# EAGLE board MIDILodica Mother Board (EAGLE 9.7.0)
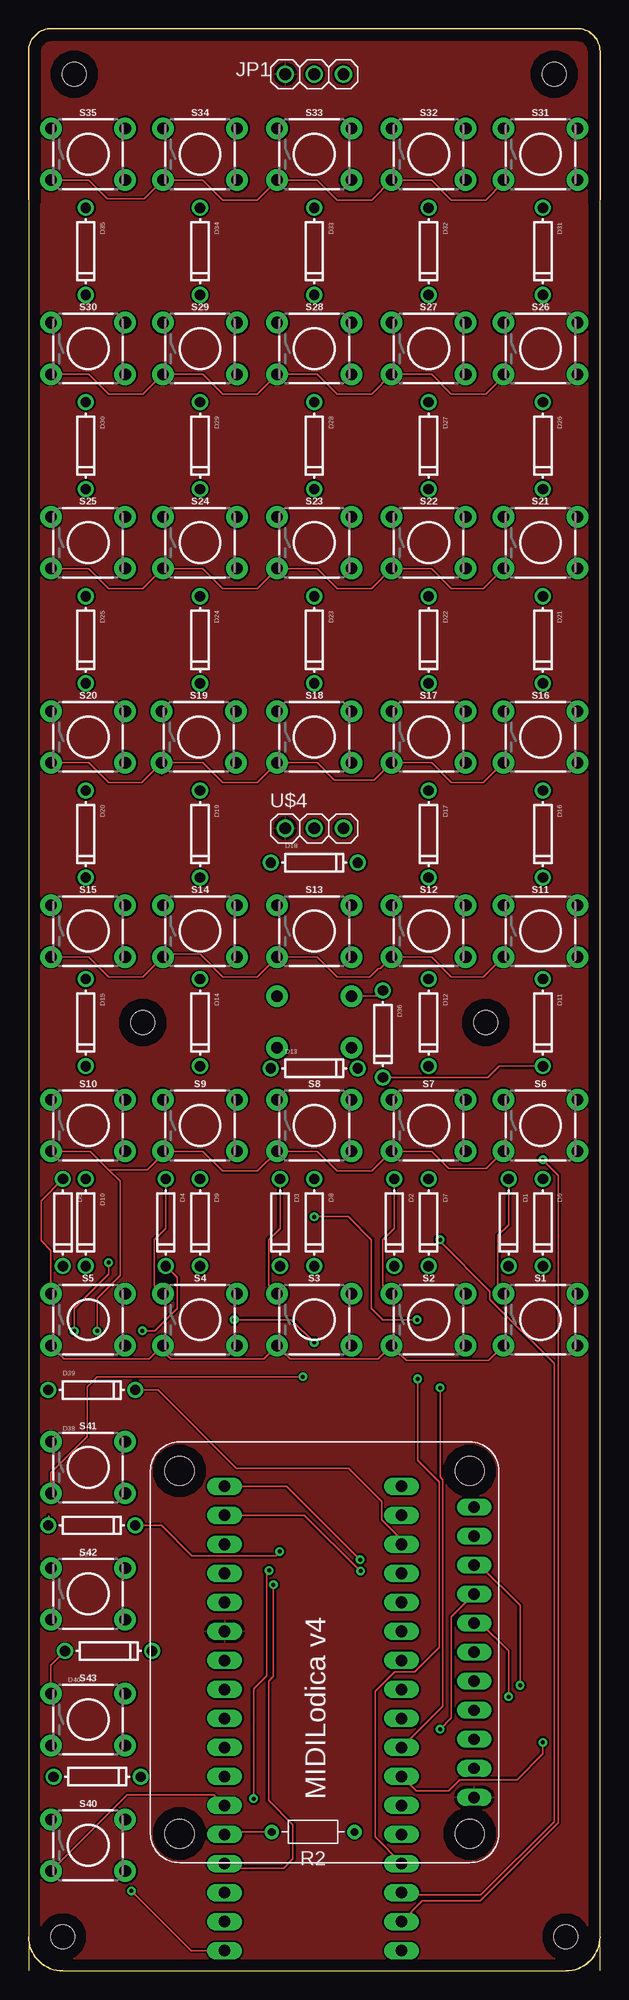
[diagram p0: board, top side]
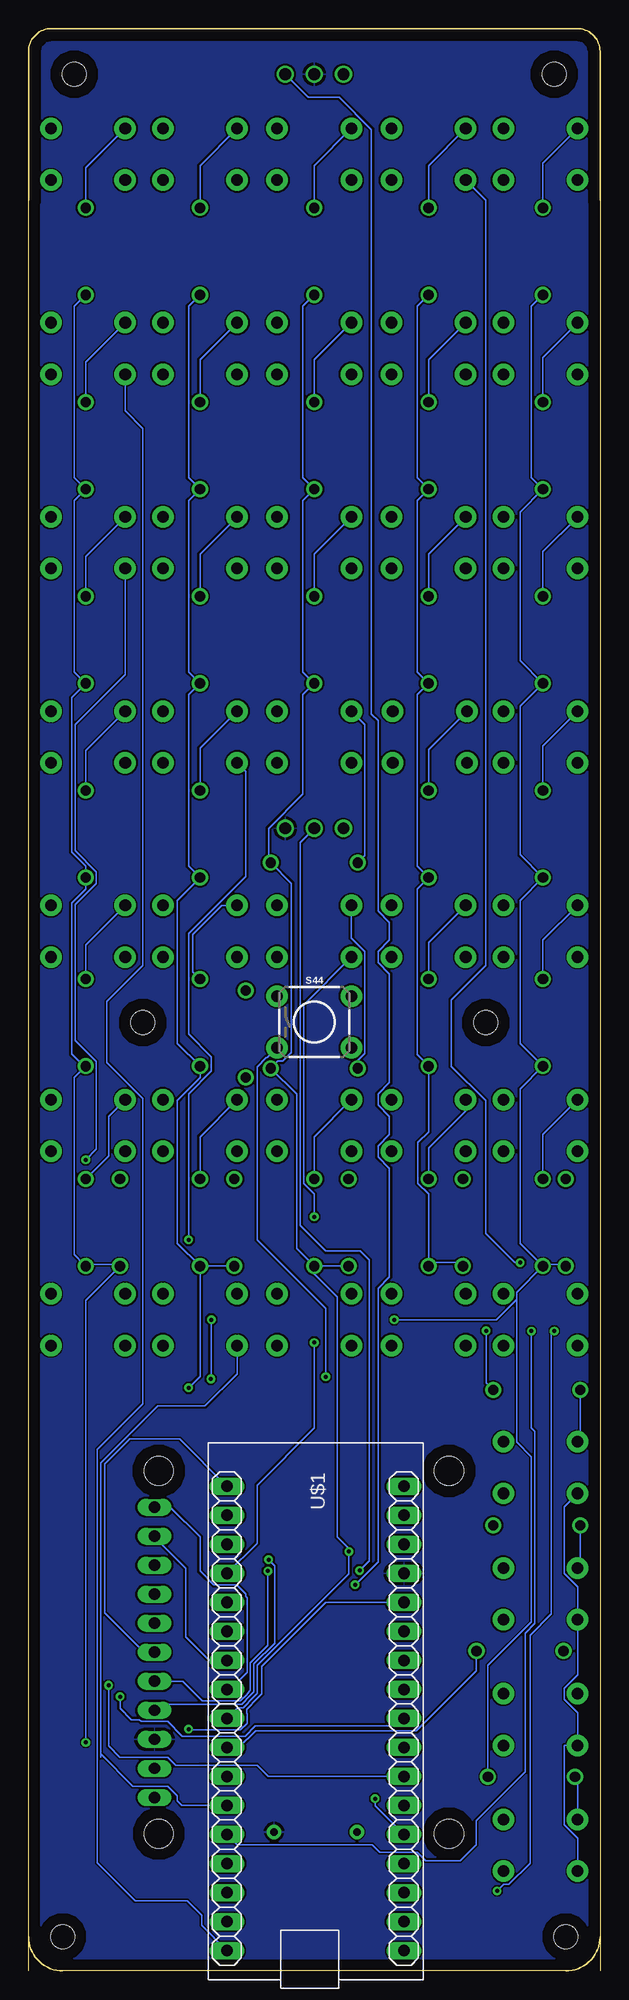
[diagram p1: board, bottom side, seen from below]

Size 50 x 170 mm. Coordinates in mm from the lower left corner, seen from the top.
Outline: 50,0 50,3
Outline: 50,3 50,155 50,168 arc90 48,170 2,170 arc90 0,168 0,155 0,3
Outline: 0,3 0,0
Outline: 0,3 arc90 3,0 47,0 arc90 50,3
Copper layers (1*16): Top / Bottom
Stack-up Default Layer Stack: Top User Defined 0.035mm / Dielectric-1 User Defined 1.5mm / Bottom User Defined 0.035mm
Design rules "default": minimum track width 6mil, minimum drill 0.35mm, track to track 6mil, track to pad 6mil, pad to pad 6mil, via to via 6mil, smd to smd 6mil, copper to edge 40mil, drill to drill 6mil, minimum pad ring 10mil, minimum via ring 8mil, stop-mask expansion 4mil, vias tented up to drill 0mil, thermal gap 10mil
Holes 2.1 mm at 4,166 46,166 3,3 47,3 10,83 40,83

## Footprints (pad centres in the part's own frame; a part is rotated, then mirrored left to right if it is on the bottom)
DO-1N4148 = drill 0.9: A -3.81,0; C 3.81,0
1X03 = drill 1.016: 1 -2.54,0; 2 0,0; 3 2.54,0
RESAD724W46L381D178B = drill 0.66 pad 1.26: 1 -3.62,0; 2 3.62,0
TL1105SPF160Q = drill 1.016 pad 1.88: 1 -3.251,2.261; 2 3.251,2.261; 3 -3.251,-2.261; 4 3.251,-2.261
ARDUINO-MICRO = drill 1.016 long: 1 3.81,1.651; 2 6.35,1.651; 3 8.89,1.651; 4 11.43,1.651; 5 13.97,1.651; 6 16.51,1.651; 7 19.05,1.651; 8 21.59,1.651; 9 24.13,1.651; 10 26.67,1.651; 11 29.21,1.651; 12 31.75,1.651; 13 34.29,1.651; 14 36.83,1.651; 15 39.37,1.651; 16 41.91,1.651; 17 44.45,1.651; 18 3.81,17.131; 19 6.35,17.131; 20 8.89,17.131; 21 11.43,17.131; 22 13.97,17.131; 23 16.51,17.131; 24 19.05,17.131; 25 21.59,17.131; 26 24.13,17.131; 27 26.67,17.131; 28 29.21,17.131; 29 31.75,17.131; 30 34.29,17.131; 31 36.83,17.131; 32 39.37,17.131; 33 41.91,17.131; 34 44.45,17.131
ADAFRUIT-ST7789-320X172 = drill 1 long: P$0 3.175,-0.381; P$1 5.715,-0.381; P$2 8.255,-0.381; P$3 10.795,-0.381; P$4 13.335,-0.381; P$5 15.875,-0.381; P$6 18.415,-0.381; P$7 20.955,-0.381; P$8 23.495,-0.381; P$9 26.035,-0.381; P$10 28.575,-0.381 | hole 2.54: 0,0; 31.75,0; 0,25.4; 31.75,25.4
SOFTPOT-1 = drill 1.016: 1 -2.54,0; 2 0,0; 3 2.54,0

## Placement (x,y rotation side)
D1  [DO-1N4148]  42,65.5 270 top
D2  [DO-1N4148]  32,65.5 270 top
D3  [DO-1N4148]  22,65.5 270 top
D4  [DO-1N4148]  12,65.5 270 top
D5  [DO-1N4148]  3,65.5 270 top
D6  [DO-1N4148]  45,65.5 270 top
D7  [DO-1N4148]  35,65.5 270 top
D8  [DO-1N4148]  25,65.5 270 top
D9  [DO-1N4148]  15,65.5 270 top
D10  [DO-1N4148]  5,65.5 270 top
D11  [DO-1N4148]  45,83 270 top
D12  [DO-1N4148]  35,83 270 top
D13  [DO-1N4148]  25,79 0 top
D14  [DO-1N4148]  15,83 270 top
D15  [DO-1N4148]  5,83 270 top
D16  [DO-1N4148]  45,99.5 270 top
D17  [DO-1N4148]  35,99.5 270 top
D18  [DO-1N4148]  25,97 0 top
D19  [DO-1N4148]  15,99.5 270 top
D20  [DO-1N4148]  5,99.5 270 top
D21  [DO-1N4148]  45,116.5 270 top
D22  [DO-1N4148]  35,116.5 270 top
D23  [DO-1N4148]  25,116.5 270 top
D24  [DO-1N4148]  15,116.5 270 top
D25  [DO-1N4148]  5,116.5 270 top
D26  [DO-1N4148]  45,133.5 270 top
D27  [DO-1N4148]  35,133.5 270 top
D28  [DO-1N4148]  25,133.5 270 top
D29  [DO-1N4148]  15,133.5 270 top
D30  [DO-1N4148]  5,133.5 270 top
D31  [DO-1N4148]  45,150.5 270 top
D32  [DO-1N4148]  35,150.5 270 top
D33  [DO-1N4148]  25,150.5 270 top
D34  [DO-1N4148]  15,150.5 270 top
D35  [DO-1N4148]  5,150.5 270 top
D36  [DO-1N4148]  31,82 270 top
D37  [DO-1N4148]  7,28 0 top
D38  [DO-1N4148]  5.53,39 0 top
D39  [DO-1N4148]  5.53,50.84 0 top
D40  [DO-1N4148]  6,17 0 top
JP1  [1X03]  25,166 0 top
R2  [RESAD724W46L381D178B]  24.9,12.17 180 top
S1  TL1105SPF160Q  [TL1105SPF160Q]  44.79,57 0 top
S2  TL1105SPF160Q  [TL1105SPF160Q]  35,57 0 top
S3  TL1105SPF160Q  [TL1105SPF160Q]  25,57 0 top
S4  TL1105SPF160Q  [TL1105SPF160Q]  15,57 0 top
S5  TL1105SPF160Q  [TL1105SPF160Q]  5.21,57 0 top
S6  TL1105SPF160Q  [TL1105SPF160Q]  44.79,74 0 top
S7  TL1105SPF160Q  [TL1105SPF160Q]  35,74 0 top
S8  TL1105SPF160Q  [TL1105SPF160Q]  25,74 0 top
S9  TL1105SPF160Q  [TL1105SPF160Q]  15,74 0 top
S10  TL1105SPF160Q  [TL1105SPF160Q]  5.21,74 0 top
S11  TL1105SPF160Q  [TL1105SPF160Q]  44.79,91 0 top
S12  TL1105SPF160Q  [TL1105SPF160Q]  35,91 0 top
S13  TL1105SPF160Q  [TL1105SPF160Q]  25,91 0 top
S14  TL1105SPF160Q  [TL1105SPF160Q]  15,91 0 top
S15  TL1105SPF160Q  [TL1105SPF160Q]  5.21,91 0 top
S16  TL1105SPF160Q  [TL1105SPF160Q]  44.79,108 0 top
S17  TL1105SPF160Q  [TL1105SPF160Q]  35,108 0 top
S18  TL1105SPF160Q  [TL1105SPF160Q]  25,108 0 top
S19  TL1105SPF160Q  [TL1105SPF160Q]  14.88,108 0 top
S20  TL1105SPF160Q  [TL1105SPF160Q]  5.21,108 0 top
S21  TL1105SPF160Q  [TL1105SPF160Q]  44.79,125 0 top
S22  TL1105SPF160Q  [TL1105SPF160Q]  35,125 0 top
S23  TL1105SPF160Q  [TL1105SPF160Q]  25,125 0 top
S24  TL1105SPF160Q  [TL1105SPF160Q]  15,125 0 top
S25  TL1105SPF160Q  [TL1105SPF160Q]  5.21,125 0 top
S26  TL1105SPF160Q  [TL1105SPF160Q]  44.79,142 0 top
S27  TL1105SPF160Q  [TL1105SPF160Q]  35,142 0 top
S28  TL1105SPF160Q  [TL1105SPF160Q]  25,142 0 top
S29  TL1105SPF160Q  [TL1105SPF160Q]  15,142 0 top
S30  TL1105SPF160Q  [TL1105SPF160Q]  5.21,142 0 top
S31  TL1105SPF160Q  [TL1105SPF160Q]  44.79,159 0 top
S32  TL1105SPF160Q  [TL1105SPF160Q]  35,159 0 top
S33  TL1105SPF160Q  [TL1105SPF160Q]  25,159 0 top
S34  TL1105SPF160Q  [TL1105SPF160Q]  15,159 0 top
S35  TL1105SPF160Q  [TL1105SPF160Q]  5.21,159 0 top
S40  TL1105SPF160Q  [TL1105SPF160Q]  5.21,11 0 top
S41  TL1105SPF160Q  [TL1105SPF160Q]  5.21,44.06 0 top
S42  TL1105SPF160Q  [TL1105SPF160Q]  5.21,33 0 top
S43  TL1105SPF160Q  [TL1105SPF160Q]  5.21,22 0 top
S44  TL1105SPF160Q  [TL1105SPF160Q]  25,83.06 0 bottom
U$1  ARDUINO_MICRO  [ARDUINO-MICRO]  34.29,46.23 270 bottom
U$2  ADAFRUIT-ST7789-320X172  [ADAFRUIT-ST7789-320X172]  38.61,12.02 90 top
U$4  SOFTPOT  [SOFTPOT-1]  25,100 0 top

## Library data of the parts
D1-D40 JP1 = adafruit
R2 = Resistor; CATEGORY: Resistor; SUB-CATEGORY: Fixed
S1-S35 S40-S44 U$1 U$2 U$4 = Standard

## Nets
5V+: JP1.1 U$1.23 U$2.P$0 U$4.1
GND: JP1.2 R2.1 U$1.21 U$2.P$2 U$4.3
N$2: R2.2 U$1.30 U$4.2
N$3: JP1.3 U$1.31
N$4: D25.A S25.1
N$5: D24.A S24.1
N$6: D23.A S23.1
N$7: U$1.26 U$2.P$6
N$8: D4.C D9.C D14.C D19.C D24.C D29.C D34.C D39.C U$1.3
N$9: D22.A S22.1
N$10: D39.A S41.1
N$11: D38.A S42.1
N$12: D37.A S43.1
N$13: D1.A S1.1
N$14: D2.A S2.1
N$15: D3.A S3.1
N$16: D4.A S4.1
N$17: D5.A S5.1
N$18: D10.A S10.1
N$19: D9.A S9.1
N$20: D8.A S8.1
N$21: D7.A S7.1
N$22: D6.A S6.1
N$23: D36.A S44.1
N$24: D21.A S21.1
N$25: S40.3 S41.3 S42.3 S43.3 S44.3 U$1.29
N$26: D30.A S30.1
N$27: D29.A S29.1
N$28: D28.A S28.1
N$29: U$1.22 U$2.P$7
N$30: D27.A S27.1
N$31: D26.A S26.1
N$32: U$1.28 U$2.P$8
N$33: D35.A S35.1
N$34: D34.A S34.1
N$35: D11.A S11.1
N$36: D12.A S12.1
N$37: D13.A S13.1
N$38: D14.A S14.1
N$39: D15.A S15.1
N$40: D20.A S20.1
N$41: D19.A S19.1
N$42: D18.A S18.1
N$43: D17.A S17.1
N$44: D16.A S16.1
N$45: D33.A S33.1
N$46: D32.A S32.1
N$47: D31.A S31.1
N$48: U$1.18 U$2.P$3
N$49: U$1.19 U$2.P$4
N$50: U$1.7 U$2.P$9
N$51: U$1.8 U$2.P$10
N$52: U$1.1 U$2.P$5
N$53: D1.C D6.C D11.C D16.C D21.C D26.C D31.C D36.C U$1.11
N$54: D2.C D7.C D12.C D17.C D22.C D27.C D32.C D37.C U$1.10
N$55: D3.C D8.C D13.C D18.C D23.C D28.C D33.C D38.C U$1.9
N$56: D5.C D10.C D15.C D20.C D25.C D30.C D35.C D40.C U$1.4
N$57: D40.A S40.1
N$59: S1.3 S2.3 S3.3 S4.3 S5.3 U$1.12
N$60: S6.3 S7.3 S8.3 S9.3 S10.3 U$1.13
N$61: S11.3 S12.3 S13.3 S14.3 S15.3 U$1.14
N$62: S16.3 S17.3 S18.3 S19.3 S20.3 U$1.15
N$63: S21.3 S22.3 S23.3 S24.3 S25.3 U$1.16
N$64: S26.3 S27.3 S28.3 S29.3 S30.3 U$1.17
N$65: S31.3 S32.3 S33.3 S34.3 S35.3 U$1.34

## Tracks (layer width: path | path; a pad name or v marks a point on that pad's centre or on a via)
5V+
  pour Top: 0,0 50,0 50,175 0,175
GND
  pour Bottom: 1,169 49,169 49,1.33 48.5,1 3,1 1,3
N$2  (via drill 0.35)
  Top 0.152: v19.68,15.08 19.68,24.68 20.82,25.82 20.82,34.82 v21.04,35.04 | R2.2 17.39,12.17 U$1.30
  Bottom 0.152: U$4.2 26.24,98.76 26.24,65.24 24,63 20.99,63 20.2,62.21 20.2,35.89 v21.04,35.04 | v19.68,15.08 19.68,14.46 U$1.30
N$3  (via drill 0.35)
  Top 0.152: v21.43,33.8 21.43,25.77 21,25.34 21,14.93 23.14,12.79 23.14,9.82 22.32,9 17.56,9 U$1.31
  Bottom 0.152: v21.43,33.8 19.42,35.81 19.42,59.74 18.42,60.74 18.42,70.25 19.42,71.25 19.42,72.22 18.42,73.22 18.42,74.78 19.42,75.78 19.42,76.75 18.42,77.75 18.42,87.25 19.42,88.25 19.42,89.22 18.42,90.22 18.42,91.78 19.42,92.78 19.42,109.42 20,110 20,161.16 22.84,164 25.54,164 JP1.3
N$4
  Bottom 0.152: S25.1 5,124.22 D25.A
N$5
  Bottom 0.152: S24.1 15,124.01 D24.A
N$6
  Bottom 0.152: S23.1 25,124.01 D23.A
N$7  (via drill 0.35)
  Top 0.152: v42,24 42,26 42,26.42 42,28 39.57,30.43 U$2.P$6
  Bottom 0.152: U$1.26 17.82,21.43 30.16,21.43 31.04,20.55 36.55,20.55 37.83,21.83 40.15,21.83 40.32,22 41,22 42,23 v42,24
N$8  (via drill 0.35)
  Top 0.152: D4.C 13,60.69 13,58 11.04,56.03 v9.96,56.03 | U$1.3 32.64,37.72 30.89,39.47 30.89,41.11 28,44 18.18,44 11.34,50.84 D39.C
  Bottom 0.152: D34.C 16,145.69 16,130.69 D29.C 16,128.69 16,113.69 D24.C 16,111.69 16,96.69 D19.C 16,94.69 16,80.19 D14.C 15,73.44 15.93,72.51 15.93,68.92 15,67.99 15,62 | 15,62 D9.C | D4.C 12.31,62 15,62 | v9.96,56.03 9.96,51.47 D39.C
N$9
  Bottom 0.152: S22.1 35,124.01 D22.A
N$10
  Bottom 0.152: D39.A 1.72,46.55 S41.1
N$11
  Top 0.152: 1.75,39.85 1.75,39.03 D38.A
  Bottom 0.152: D38.A 1.72,35.5 S42.1
N$12
  Top 0.152: S43.1 1.96,26.77 D37.A
N$13
  Top 0.152: S1.1 41.11,59.26 41.07,59.3 41.07,64.38 42,65.31 D1.A
N$14
  Top 0.152: D2.A 32,65 31,64 31,60.01 S2.1
  Bottom 0.152: S2.1 31.75,59.66
N$15
  Top 0.152: D3.A 22,65 21,64 21,60.01 S3.1
N$16
  Top 0.152: D4.A 12,65 11,64 11,60.01 S4.1
N$17
  Top 0.152: D5.A 1.09,67.4 1.09,63.92 1.96,63.05 S5.1
N$18
  Bottom 0.152: S10.1 5,73.22 D10.A
N$19
  Bottom 0.152: S9.1 11.75,75.26 15,72.01 D9.A
N$20
  Bottom 0.152: S8.1 25,73.01 D8.A
N$21
  Bottom 0.152: S7.1 35,73.01 D7.A
N$22
  Bottom 0.152: S6.1 43,74.8 43,71.31 D6.A
N$23
  Top 0.152: S44.1 30.51,85.32 D36.A
N$24
  Bottom 0.152: S21.1 45,123.8 D21.A
N$25  (via drill 0.35)
  Top 0.152: v24,52 6,52 5.12,51.12 5.12,46.78 1.96,43.61 S41.3 | U$1.29 16.21,15.43 8.64,15.43 S40.3
  Bottom 0.152: S44.3 29.11,79.93 29.2,79.93 30,79.13 30,64 24,58 v24,52 | S40.3 1.96,11.61 3.12,12.78 3.12,19.74 S43.3 1.96,22.61 3.12,23.78 3.12,24.75 1.96,25.91 S42.3 1.96,33.61 3.12,34.78 3.12,40.63 S41.3
N$26
  Bottom 0.152: S30.1 5,141.22 D30.A
N$27
  Bottom 0.152: S29.1 15,141.01 D29.A
N$28
  Bottom 0.152: S28.1 25,141.01 D28.A
N$29  (via drill 0.35)
  Top 0.152: v36,21.16 37,22.16 37,31 38.97,32.97 U$2.P$7
  Bottom 0.152: U$1.22 24,32.26 29.59,26.67 29.59,24.26 29.97,23.88 29.97,23.85 30.91,22.91 30.91,22.53 30.89,22.51 30.89,21.69 31.47,21.11 35.95,21.11 v36,21.16
N$30
  Bottom 0.152: S27.1 35,141.01 D27.A
N$31
  Bottom 0.152: S26.1 45,140.8 D26.A
N$32  (via drill 0.35)
  Top 0.152: v43,25 43,30 43,30.11 43,32 39.49,35.51 U$2.P$8
  Bottom 0.152: U$1.28 29.02,17.02 30.01,18.01 34.99,18.01 35,18 37.11,18 37.83,18.71 42.01,18.71 43,19.71 v43,25
N$33
  Bottom 0.152: S35.1 5,158.22 D35.A
N$34
  Bottom 0.152: S34.1 15,158.01 D34.A
N$35
  Bottom 0.152: S11.1 45,89.8 D11.A
N$36
  Bottom 0.152: S12.1 33.1,93.26 35.63,90.73 35.63,87.44 D12.A
N$37
  Bottom 0.152: S13.1 21.75,90.39 20.58,89.22 20.58,80.31 21.19,79.7 D13.A
N$38
  Bottom 0.152: S14.1 15,90.01 D14.A
N$39
  Bottom 0.152: S15.1 5,90.22 D15.A
N$40
  Bottom 0.152: S20.1 5,107.22 D20.A
N$41
  Bottom 0.152: S19.1 15,106.89 D19.A
N$42
  Bottom 0.152: S18.1 20.58,109.09 20.58,97.61 D18.A
N$43
  Bottom 0.152: S17.1 35,107.01 D17.A
N$44
  Bottom 0.152: S16.1 45,106.8 D16.A 45,103
N$45
  Bottom 0.152: S33.1 25,158.01 D33.A
N$46
  Bottom 0.152: S32.1 35,158.01 D32.A
N$47
  Bottom 0.152: S31.1 45,157.8 D31.A
N$48  (via drill 0.35)
  Top 0.152: U$1.18 22.58,42.42 v29,36
  Bottom 0.152: v29,36 28.45,35.45 28.45,28.69 30.28,26.86 30.28,24.43 30.58,24.13 30.58,24.1 31.34,23.34 38.46,23.34 U$2.P$3
N$49  (via drill 0.35)
  Top 0.152: U$1.19 24.12,39.88 29,35 v29.05,35
  Bottom 0.152: v29.05,35 29.05,28.51 30.58,26.99 30.58,24.56 30.89,24.25 30.89,24.23 31.47,23.65 34.81,23.65 36.52,25.35 U$2.P$4
N$50
  Bottom 0.152: U$1.7 34.18,27.18 36.25,29.25 36.25,35.25 38.99,37.99 U$2.P$9
N$51
  Bottom 0.152: U$1.8 32.36,24.64 30.89,26.11 30.89,32.67 31,32.78 31,33 31.8,33.8 33.8,33.8 35,35 35,38 37.59,40.59 U$2.P$10
N$52
  Bottom 0.152: U$1.1 36.78,46.56 41.15,46.56 43.34,44.37 43.34,31.34 42,30 41.89,29.89 39.89,27.89 U$2.P$5
N$53  (via drill 0.35)
  Top 0.152: D36.C 40.19,78.19 41.19,79.19 D11.C | U$1.11 33.91,15.75 36.75,15.75 37.75,16.75 42.75,16.75 45,19 v45,20
  Bottom 0.152: D31.C 46,145.69 46,130.69 D26.C 46,128.69 46,113.69 D21.C 46.24,111.45 46.24,97.93 45,96.69 D16.C 45,94.69 46.24,93.45 46.24,80.24 45.09,79.09 | D11.C 45.09,79.09 | 45.09,79.09 46,78.19 46,62.69 45.16,61.84 | 45.16,61.84 D6.C | 45.16,61.84 42.16,61.84 D1.C 45,58.69 v45,20
N$54  (via drill 0.35)
  Top 0.152: U$1.10 36.25,23.16 36.25,43 36,43.25 v36,51.04
  Bottom 0.152: D32.C 36,145.69 36,130.69 D27.C 36,128.69 36,113.69 D22.C 36,111.69 36,96.69 D17.C 37,93.69 37,81.19 D12.C 35,78.19 37,76.19 37,63.69 D7.C | D2.C D7.C | U$1.10 31.6,19.56 30.12,21.04 16.06,21.04 10.81,26.28 D37.C | v36,51.04 35,52.04 D7.C
N$55  (via drill 0.35)
  Top 0.152: v21.97,36.7 21.61,36.35 14.29,36.35 11.63,39 D38.C
  Bottom 0.152: D33.C 26,145.69 26,130.69 D28.C 26,128.69 26,113.69 D23.C 26,111.69 26,103 29,100 29,97.19 D18.C 27,95.19 27,80.39 27.77,79.63 28.18,79.63 D13.C 26.54,76.73 26.54,63.23 D8.C | D3.C D8.C | D8.C 25,61 23,59 23,38 21.97,36.97 v21.97,36.7 21.97,34.74 29.97,26.73 29.97,24.31 30.28,24 30.28,23.98 31.21,23.04 31.7,23.04 U$1.9
N$56  (via drill 0.35)
  Top 0.152: v18,57 23,57 v25,55
  Bottom 0.152: D35.C 6,145.69 6,130.69 D30.C 7,127.69 7,114.69 D25.C 7,110.69 7,97.69 D20.C 7,93.69 7,81.19 D15.C 7,77.19 7,63.69 5.16,61.84 | 5.16,61.84 D10.C 7.29,59.4 7.29,58.78 | D5.C 3.15,61.84 5.16,61.84 | 7.29,58.78 9.07,57 v18,57 | 7.29,58.78 7.29,46.29 6,45 6,30.55 9.81,26.73 D40.C | v25,55 25,47.52 30,42.52 30,37.44 U$1.4
N$57
  Bottom 0.152: D40.A 1.96,16.77 S40.1
N$59
  Top 0.152: S1.3 40.25,53.45 33.04,53.45 S2.3 30.58,53.57 22.92,53.57 S3.3 20.58,53.57 12.43,53.57 11.75,54.25 S4.3 10.58,53.57 3.12,53.57 S5.3
  Bottom 0.152: S2.3 31.75,52.25 34.57,49.43 38.71,49.43 43.69,44.46 43.69,19 | U$1.12 36.59,14.48 37,14.89 37,15.35 37.83,16.18 40.86,16.18 43.69,19 | 43.69,19 43.69,18.69
N$60  (via drill 0.35)
  Top 0.152: v6,56 6,58.88 8,60.88 8,69.12 7,70.12 | S10.3 5.38,71.74 7,70.12 | S9.3 12,71.74 | 12,71.74 15.26,71.74 17,70 20.01,70 S8.3 25.26,71.74 27,70 30.01,70 S7.3 35.26,71.74 36.76,70.24 40.05,70.24 S6.3 | 7,70.12 10.38,70.12 12,71.74
  Bottom 0.152: v6,56 6,47.53 5.7,47.22 5.7,30.42 6.56,29.55 6.56,17.44 10.85,13.15 10.85,11.04 12.23,9.65 15.25,9.65 15.99,10.39 19.28,10.39 19.92,11.03 31.73,11.03 U$1.13
N$61  (via drill 0.35)
  Top 0.152: v25,66 25.02,66.02 28,66.02 28,66 30,64 30,58 31,57 v34,57 | S15.3 5.26,88.74 7,87 10.01,87 S14.3 | 11.75,88.37 S14.3 | S14.3 12.01,89 15,89 17,87 20.01,87 S13.3 25.26,88.74 27,87 29.87,87 30.61,87.74 30.75,87.74 S12.3 35.26,88.74 37,87 39.8,87 S11.3 | U$1.14 30.32,11.72 30.32,24.48 32.02,26.19 33.81,26.19 35.94,28.32 35.94,42.8 34.05,44.69 v34.05,51.81
  Bottom 0.152: v34,57 34.04,56.96 34.04,51.82 v34.05,51.81 | v25,66 25,67.99 25.93,68.92 25.93,84.56 S13.3
N$62  (via drill 0.35)
  Top 0.152: S20.3 5.26,105.74 7,104 9.89,104 S19.3 | 11.63,104.75 S19.3 | S19.3 15.26,105.74 17,104 20.01,104 S18.3 25.26,105.74 26.76,104.24 30.25,104.24 S17.3 35.26,105.74 37,104 39.8,104 S16.3 | U$1.15 32.84,6.66 39.59,6.66 46,13.07 46,53.15 40.37,58.78 40.37,59.49 36,63.86 v36,64
  Bottom 0.152: S17.3 30.99,104.98 30.99,95.8 36,90.79 36,82 34,80 34,78.76 36,76.76 v36,64
N$63  (via drill 0.35)
  Top 0.152: S25.3 5.26,122.74 7,121 10.01,121 S24.3 15.26,122.74 17,121 20.01,121 S23.3 25.26,122.74 27,121 30.01,121 S22.3 35.26,122.74 37,121 39.8,121 S21.3 | U$1.16 34.46,6.14 39.54,6.14 46.36,12.96 46.36,69.64 v45,71
  Bottom 0.152: S21.3 41.54,113.46 45.93,109.07 45.93,98.05 44.07,96.19 44.07,95.19 45.93,93.33 45.93,81.44 44.07,79.58 44.07,71.93 v45,71
N$64
  Top 0.152: S30.3 5.26,139.74 7,138 10.01,138 S29.3 | 11.75,138.87 S29.3 | S29.3 15.26,139.74 17,138 20.01,138 S28.3 25.26,139.74 27,138 30.01,138 S27.3 35.26,139.74 37,138 40,138 41.54,139.54 S26.3
  Bottom 0.152: S26.3 41.54,136.54 40,135 40,88 43.14,84.86 43.14,79.51 40,76.37 40,49.63 44,45.63 44,9.46 40.69,6.14 36.11,6.14 34.86,4.89 34.86,4 U$1.17
N$65  (via drill 0.35)
  Top 0.152: v7,62 7,61 4,58 v4,56 | S35.3 5.26,156.74 6.88,155.12 10.13,155.12 S34.3 | 11.75,155.87 S34.3 | S34.3 15.26,156.74 17,155 20.01,155 S33.3 25.26,156.74 27,155 30.01,155 S32.3 35.26,156.74 37,155 40,155 41.54,156.54 S31.3 | v9,7 14.22,1.78 U$1.34
  Bottom 0.152: v7,62 7.45,62 10,64.55 10,76.16 13,79.16 13,85 10,88 10,154.99 S34.3 | v4,56 4.26,55.74 4.26,31.25 6.12,29.39 6.12,9.42 7.97,7.57 8.43,7.57 v9,7

## Text on the board
tNames: MIDILodica v4